# EAGLE board stream_i-o_2_3_Alap (EAGLE 7.4.0), part 1 of 2
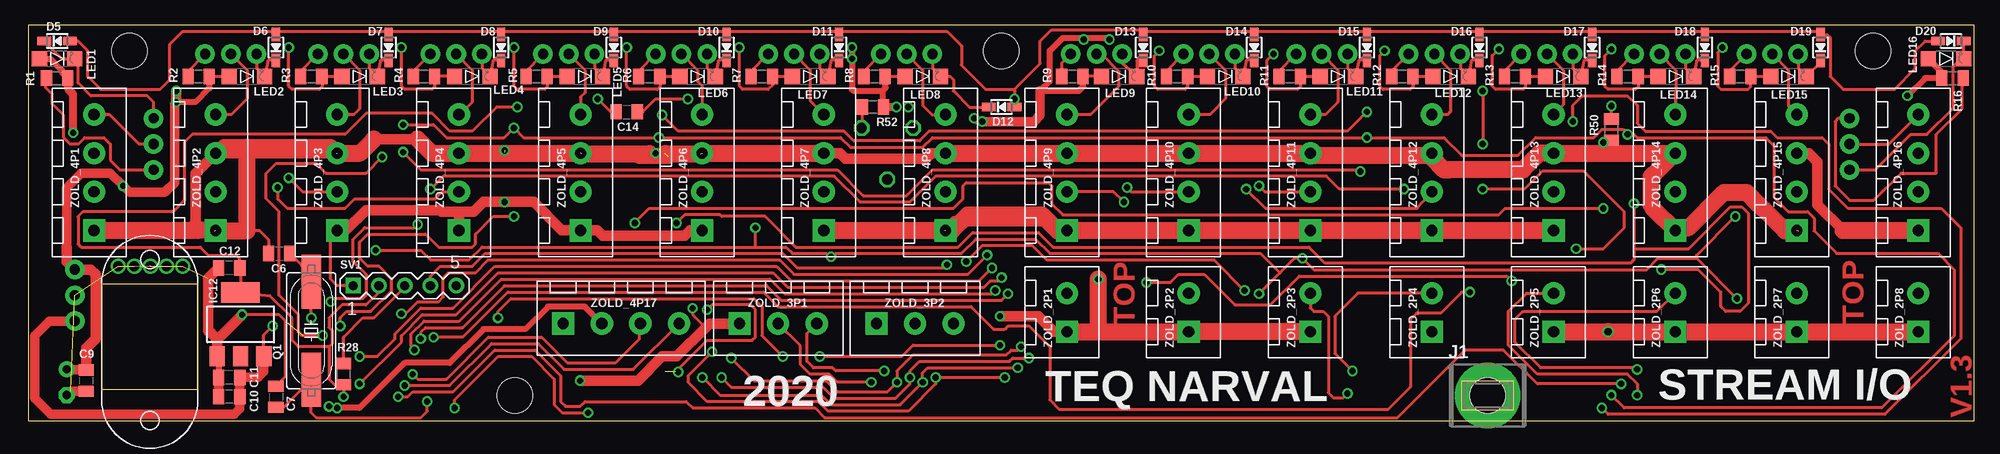
[diagram p0: board, top side]
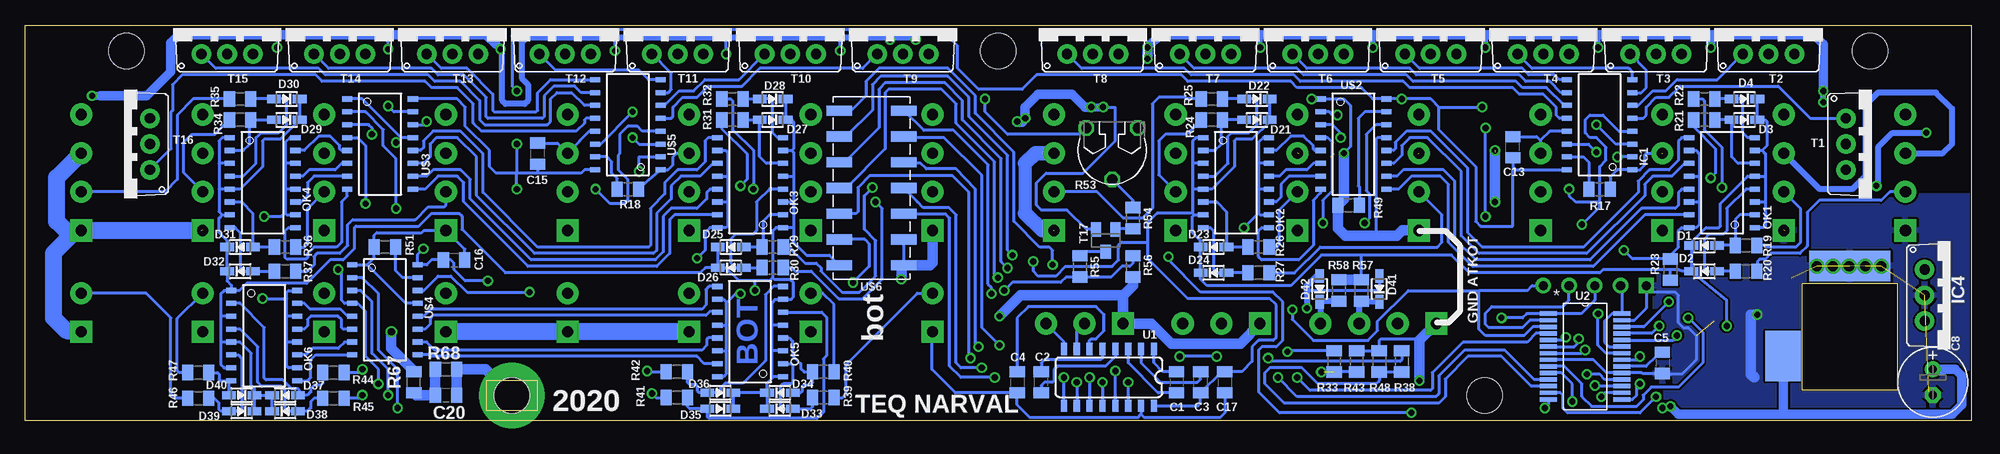
[diagram p1: board, bottom side, seen from below]

Size 192 x 39 mm. Coordinates in mm from the lower left corner, seen from the top.
Outline: 0,0 192,0 192,39 0,39 0,0
Copper layers (1*16): Top 0.035mm / dielectric 1.5mm / Bottom 0.035mm
Design rules "10mil *": minimum track width 10mil, minimum drill 24mil, track to track 7mil, track to pad 7mil, pad to pad 7mil, via to via 7mil, smd to smd 7mil, copper to edge 5mil, drill to drill 5mil, minimum pad ring 10mil, minimum via ring 8mil, stop-mask expansion 4mil, vias tented up to drill 0mil, thermal gap 10mil
Net classes: 0 default: width 0.203 mm, clearance 0.203 mm
Holes 3.5 mm at 10,36.5 96,36.5 182,36.5 48,2.5 144,2.5

## Footprints (pad centres in the part's own frame; a part is rotated, then mirrored left to right if it is on the bottom)
C0805 = smd 1.1 x 1.5: 1 -1.05,0; 2 1.05,0
E2,5-7 = drill 0.813 pad 1.6: + -1.27,0 | drill 0.813 pad 1.6 octagon: - 1.27,0
SOD-323 = smd 1.35 x 0.8: A 1.27,0; C -1.27,0
DC_55/21 = smd 8 x 3 bottom: 1 0,6.985 | smd 3.5 x 5 bottom: 2 6.565,-1.905
SOP16 = smd 1 x 0.5: 1 -3.24,4.445; 2 -3.24,3.175; 3 -3.24,1.905; 4 -3.24,0.635; 5 -3.24,-0.635; 6 -3.24,-1.905; 7 -3.24,-3.175; 8 -3.24,-4.445; 9 3.24,-4.445; 10 3.24,-3.175; 11 3.24,-1.905; 12 3.24,-0.635; 13 3.24,0.635; 14 3.24,1.905; 15 3.24,3.175; 16 3.24,4.445
TO220V = drill 1.016 pad 1.93: 1 -2.54,-2.54; 2 0,-2.54; 3 2.54,-2.54
SOT223 = smd 1.5 x 2: 1 -2.3,-3.15; 2 0,-3.15; 3 2.3,-3.15 | smd 3.8 x 2: 4 0,3.15
62221 = drill 3.5 pad 6.452: 1 0,0
CHIPLED_1206 = smd 1.5 x 1.5: A 0,-1.75; C 0,1.75
MINI-FLAT-16 = smd 1 x 0.5: 1 -3.24,4.445; 2 -3.24,3.175; 3 -3.24,1.905; 4 -3.24,0.635; 5 -3.24,-0.635; 6 -3.24,-1.905; 7 -3.24,-3.175; 8 -3.24,-4.445; 9 3.24,-4.445; 10 3.24,-3.175; 11 3.24,-1.905; 12 3.24,-0.635; 13 3.24,0.635; 14 3.24,1.905; 15 3.24,3.175; 16 3.24,4.445
HC49UP = smd 5.334 x 1.93: 1 -4.826,0; 2 4.826,0
R0805 = smd 1.1 x 1.5: 1 -1.05,0; 2 1.05,0
PT-6 = drill 1.016 octagon: A -2.54,-5.08; E 2.54,-5.08; S 0,0
MA05-1 = drill 0.914 pad 1.524 square: 1 -5.08,0 | drill 0.914 pad 1.524: 2 -2.54,0; 3 0,0; 4 2.54,0; 5 5.08,0
SOT23-BEC = smd 1 x 1.4: B -0.95,-1.1; C 0,1.1; E 0.95,-1.1
SO016 = smd 0.6 x 1.2: 1 -4.445,-2.8; 2 -3.175,-2.8; 3 -1.905,-2.8; 4 -0.635,-2.8; 5 0.635,-2.8; 6 1.905,-2.8; 7 3.175,-2.8; 8 4.445,-2.8; 9 4.445,2.8; 10 3.175,2.8; 11 1.905,2.8; 12 0.635,2.8; 13 -0.635,2.8; 14 -1.905,2.8; 15 -3.175,2.8; 16 -4.445,2.8
SSOP28_MC = smd 1.676 x 0.432: 1 -3.617,4.225; 2 -3.617,3.575; 3 -3.617,2.925; 4 -3.617,2.275; 5 -3.617,1.625; 6 -3.617,0.975; 7 -3.617,0.325; 8 -3.617,-0.325; 9 -3.617,-0.975; 10 -3.617,-1.625; 11 -3.617,-2.275; 12 -3.617,-2.925; 13 -3.617,-3.575; 14 -3.617,-4.225; 15 3.617,-4.225; 16 3.617,-3.575; 17 3.617,-2.925; 18 3.617,-2.275; 19 3.617,-1.625; 20 3.617,-0.975; 21 3.617,-0.325; 22 3.617,0.325; 23 3.617,0.975; 24 3.617,1.625; 25 3.617,2.275; 26 3.617,2.925; 27 3.617,3.575; 28 3.617,4.225
PIN_HEADER_2X7 = smd 1.016 x 2.54: 1A -7.62,3.175; 1B -7.62,-3.175; 2A -5.08,3.175; 2B -5.08,-3.175; 3A -2.54,3.175; 3B -2.54,-3.175; 4A 0,3.175; 4B 0,-3.175; 5A 2.54,3.175; 5B 2.54,-3.175; 6A 5.08,3.175; 6B 5.08,-3.175; 7A 7.62,3.175; 7B 7.62,-3.175
ZOLD_KICSI_2P = drill 1.1 pad 2.184 square: 1 -1.905,-0.5 | drill 1.1 pad 2.184: 2 1.905,-0.5
ZOLD_KICSI_3P = drill 1.1 pad 2.184 square: 1 -3.81,-0.5 | drill 1.1 pad 2.184: 2 0,-0.5; 3 3.81,-0.5
ZOLD_KICSI_4P = drill 1.1 pad 2.184 square: 1 -5.715,-0.5 | drill 1.1 pad 2.184: 2 -1.905,-0.5; 3 1.905,-0.5; 4 5.715,-0.5

## Placement (x,y rotation side)
C1  1u  [C0805]  78.42,3.81 270 bottom
C2  1u  [C0805]  91.76,3.81 90 bottom
C3  1u  [C0805]  76.04,3.81 90 bottom
C4  1u  [C0805]  94.14,3.81 270 bottom
C5  10u  [C0805]  30.48,5.71 270 bottom
C6  22p  [C0805]  24.76,16.51 0 top
C7  22p  [C0805]  24.45,2.38 270 top
C8  220u  [E2,5-7]  3.81,3.81 270 bottom
C9  100n  [C0805]  5.71,3.97 270 top
C10  10u  [C0805]  19.84,2.38 180 top
C11  10u  [C0805]  19.84,4.29 180 top
C12  10u  [C0805]  19.84,15.08 180 top
C13  100n  [C0805]  45.24,26.99 90 bottom
C14  100n  [C0805]  59.05,30.48 0 top
C15  100n  [C0805]  141.45,26.35 90 bottom
C16  100n  [C0805]  149.7,15.88 0 bottom
C17  100n  [C0805]  73.66,3.81 270 bottom
C20  100n  [C0805]  150.5,2.54 0 bottom
D1  1N4148  [SOD-323]  26.35,17.3 0 bottom
D2  1N4148  [SOD-323]  26.35,14.76 0 bottom
D3  1N4148  [SOD-323]  22.38,29.69 180 bottom
D4  1N4148  [SOD-323]  22.38,31.75 180 bottom
D5  1N4148  [SOD-323]  2.86,37.47 0 top
D6  1N4148  [SOD-323]  24.45,36.83 90 top
D7  1N4148  [SOD-323]  35.56,36.83 90 top
D8  1N4148  [SOD-323]  46.67,36.83 90 top
D9  1N4148  [SOD-323]  57.78,36.83 90 top
D10  1N4148  [SOD-323]  68.9,36.83 90 top
D11  1N4148  [SOD-323]  80.01,36.83 90 top
D12  1N4148  [SOD-323]  96.04,30.96 0 top
D13  1N4148  [SOD-323]  110.01,36.83 90 top
D14  1N4148  [SOD-323]  120.97,36.83 90 top
D15  1N4148  [SOD-323]  132.08,36.83 90 top
D16  1N4148  [SOD-323]  143.19,36.83 90 top
D17  1N4148  [SOD-323]  154.31,36.83 90 top
D18  1N4148  [SOD-323]  165.42,36.83 90 top
D19  1N4148  [SOD-323]  176.85,36.83 90 top
D20  1N4148  [SOD-323]  189.71,37.47 180 top
D21  1N4148  [SOD-323]  70.48,29.69 180 bottom
D22  1N4148  [SOD-323]  70.48,31.75 180 bottom
D23  1N4148  [SOD-323]  74.77,17.14 0 bottom
D24  1N4148  [SOD-323]  74.77,14.61 0 bottom
D25  1N4148  [SOD-323]  122.4,17.14 0 bottom
D26  1N4148  [SOD-323]  122.4,15.12 0 bottom
D27  1N4148  [SOD-323]  118.27,29.69 180 bottom
D28  1N4148  [SOD-323]  118.27,31.75 180 bottom
D29  1N4148  [SOD-323]  166.21,29.69 180 bottom
D30  1N4148  [SOD-323]  166.21,31.75 180 bottom
D31  1N4148  [SOD-323]  170.81,17.14 0 bottom
D32  1N4148  [SOD-323]  170.81,14.76 0 bottom
D33  1N4148  [SOD-323]  117.55,1.19 0 bottom
D34  1N4148  [SOD-323]  117.55,2.78 0 bottom
D35  1N4148  [SOD-323]  123.43,1.19 180 bottom
D36  1N4148  [SOD-323]  123.43,2.78 180 bottom
D37  1N4148  [SOD-323]  166.37,2.54 0 bottom
D38  1N4148  [SOD-323]  166.37,0.95 0 bottom
D39  1N4148  [SOD-323]  170.66,0.95 180 bottom
D40  1N4148  [SOD-323]  170.66,2.54 180 bottom
D41  1N4148  [SOD-323]  58.42,13.02 90 bottom
D42  1N4148  [SOD-323]  64.29,13.02 90 bottom
DC1  DC_55/21  [DC_55/21]  12,8.3 0 top
IC1  SCT21SOP16  [SOP16]  36.67,29.21 180 bottom
IC4  7805TV  [TO220V]  2.06,12.38 270 bottom
IC12  LD117AS33TR  [SOT223]  20.95,9.53 0 top
J1  PIN1-2  [62221]  144,2.5 0 top
LED1  RED  [CHIPLED_1206]  2.86,35.72 270 top
LED2  RED  [CHIPLED_1206]  21.59,33.97 270 top
LED3  RED  [CHIPLED_1206]  32.7,33.97 270 top
LED4  RED  [CHIPLED_1206]  43.81,33.97 270 top
LED5  RED  [CHIPLED_1206]  54.93,33.97 270 top
LED6  RED  [CHIPLED_1206]  66.04,33.97 270 top
LED7  RED  [CHIPLED_1206]  77.15,33.97 270 top
LED8  RED  [CHIPLED_1206]  88.26,33.97 270 top
LED9  RED  [CHIPLED_1206]  107.63,33.97 270 top
LED10  RED  [CHIPLED_1206]  118.11,33.97 270 top
LED11  RED  [CHIPLED_1206]  129.22,33.97 270 top
LED12  RED  [CHIPLED_1206]  140.33,33.97 270 top
LED13  RED  [CHIPLED_1206]  151.45,33.97 270 top
LED14  RED  [CHIPLED_1206]  162.56,33.97 270 top
LED15  RED  [CHIPLED_1206]  173.67,33.97 270 top
LED16  RED  [CHIPLED_1206]  189.23,35.72 270 top
OK1  TLP281-4  [MINI-FLAT-16]  24.61,23.5 180 bottom
OK2  TLP281-4  [MINI-FLAT-16]  72.55,23.5 0 bottom
OK3  TLP281-4  [MINI-FLAT-16]  120.49,23.5 180 bottom
OK4  TLP281-4  [MINI-FLAT-16]  168.59,23.5 0 bottom
OK5  TLP281-4  [MINI-FLAT-16]  120.49,8.81 180 bottom
OK6  TLP281-4  [MINI-FLAT-16]  168.43,8.41 0 bottom
Q1  20MHz  [HC49UP]  27.94,8.89 90 top
R1  6R8  [R0805]  2.86,33.81 0 top
R2  6R8  [R0805]  16.83,33.97 0 top
R3  6R8  [R0805]  27.94,33.97 0 top
R4  6R8  [R0805]  39.05,33.97 0 top
R5  6R8  [R0805]  50.16,33.97 0 top
R6  6R8  [R0805]  61.28,33.97 0 top
R7  6R8  [R0805]  72.39,33.97 0 top
R8  6R8  [R0805]  83.5,33.97 0 top
R9  6R8  [R0805]  103.03,33.97 0 top
R10  6R8  [R0805]  113.35,33.97 0 top
R11  6R8  [R0805]  124.46,33.97 0 top
R12  6R8  [R0805]  135.57,33.97 0 top
R13  6R8  [R0805]  146.69,33.97 0 top
R14  6R8  [R0805]  157.8,33.97 0 top
R15  6R8  [R0805]  168.91,33.97 0 top
R16  6R8  [R0805]  189.87,33.81 180 top
R17  10k  [R0805]  36.67,22.86 180 bottom
R18  10k  [R0805]  132.56,22.86 180 bottom
R19  2k2  [R0805]  22.22,17.3 180 bottom
R20  2k2  [R0805]  22.22,14.76 180 bottom
R21  2k2  [R0805]  26.35,29.69 0 bottom
R22  2k2  [R0805]  26.35,31.75 0 bottom
R23  1k  [R0805]  29.69,14.92 270 bottom
R24  2k2  [R0805]  74.93,29.69 0 bottom
R25  2k2  [R0805]  74.93,31.75 0 bottom
R26  2k2  [R0805]  70.33,17.14 180 bottom
R27  2k2  [R0805]  70.33,14.61 180 bottom
R28  1k  [R0805]  31.11,4.6 270 top
R29  2k2  [R0805]  118.27,17.14 180 bottom
R30  2k2  [R0805]  118.27,15.12 180 bottom
R31  2k2  [R0805]  122.24,29.69 0 bottom
R32  2k2  [R0805]  122.24,31.75 0 bottom
R33  1k  [R0805]  62.86,5.87 90 bottom
R34  2k2  [R0805]  170.81,29.69 0 bottom
R35  2k2  [R0805]  170.81,31.75 0 bottom
R36  2k2  [R0805]  166.37,17.14 180 bottom
R37  2k2  [R0805]  166.37,14.76 180 bottom
R38  1k  [R0805]  56.2,5.87 90 bottom
R39  2k2  [R0805]  113.27,2.3 180 bottom
R40  2k2  [R0805]  113.27,4.84 180 bottom
R41  2k2  [R0805]  127.71,2.3 0 bottom
R42  2k2  [R0805]  127.71,4.84 0 bottom
R43  2k2  [R0805]  60.64,5.87 270 bottom
R44  2k2  [R0805]  161.61,4.76 180 bottom
R45  2k2  [R0805]  161.61,2.22 180 bottom
R46  2k2  [R0805]  174.94,2.22 0 bottom
R47  2k2  [R0805]  174.94,4.76 0 bottom
R48  2k2  [R0805]  58.42,5.87 270 bottom
R49  2k2  [R0805]  61.44,21.27 0 bottom
R50  2k2  [R0805]  156.21,28.73 90 top
R51  2k2  [R0805]  156.53,17.14 0 bottom
R52  4k7  [R0805]  83.34,30.96 0 top
R53  10k  [PT-6]  84.77,23.81 180 bottom
R54  10k  [R0805]  82.71,20 90 bottom
R55  10k  [R0805]  87.95,15.24 90 bottom
R56  3k3  [R0805]  82.71,15.24 90 bottom
R57  4k7  [R0805]  60.17,12.86 90 bottom
R58  4k7  [R0805]  62.39,12.86 90 bottom
R67  100  [R0805]  153.67,3.81 90 bottom
R68  10k  [R0805]  150.5,5.08 180 bottom
SV1  PROG  [MA05-1]  37.15,13.34 0 top
T1  BD242  [TO220V]  9.84,27.3 270 bottom
T2  BD242  [TO220V]  20,38.73 0 bottom
T3  BD242  [TO220V]  31.11,38.73 0 bottom
T4  BD242  [TO220V]  42.23,38.73 0 bottom
T5  BD242  [TO220V]  53.34,38.73 0 bottom
T6  BD242  [TO220V]  64.45,38.73 0 bottom
T7  BD242  [TO220V]  75.56,38.73 0 bottom
T8  BD242  [TO220V]  86.68,38.73 0 bottom
T9  BD242  [TO220V]  105.41,38.73 0 bottom
T10  BD242  [TO220V]  116.52,38.73 0 bottom
T11  BD242  [TO220V]  127.63,38.73 0 bottom
T12  BD242  [TO220V]  138.75,38.73 0 bottom
T13  BD242  [TO220V]  149.86,38.73 0 bottom
T14  BD242  [TO220V]  160.97,38.73 0 bottom
T15  BD242  [TO220V]  172.08,38.73 0 bottom
T16  BD242  [TO220V]  182.25,27.3 90 bottom
T17  BC858  [SOT23-BEC]  85.41,17.78 180 bottom
U1  MAX232SOIC16  [SO016]  85.09,4.29 180 bottom
U2  PIC32MX250F128B-I_SS  [SSOP28_MC]  38.1,6.35 0 bottom
U$2  SCT21SOP16  [SOP16]  60.96,27.3 0 bottom
U$3  SCT21SOP16  [SOP16]  157,27.3 0 bottom
U$4  SCT21SOP16  [SOP16]  156.53,10.95 0 bottom
U$5  SCT21SOP16  [SOP16]  132.56,29.21 180 bottom
U$6  PIN_HEADER_2X7  [PIN_HEADER_2X7]  108.51,22.97 270 bottom
ZOLD_2P1  ZOLD_KICSI_2P  [ZOLD_KICSI_2P]  102,10.7 90 top
ZOLD_2P2  ZOLD_KICSI_2P  [ZOLD_KICSI_2P]  114,10.7 90 top
ZOLD_2P3  ZOLD_KICSI_2P  [ZOLD_KICSI_2P]  126,10.7 90 top
ZOLD_2P4  ZOLD_KICSI_2P  [ZOLD_KICSI_2P]  138,10.7 90 top
ZOLD_2P5  ZOLD_KICSI_2P  [ZOLD_KICSI_2P]  150,10.7 90 top
ZOLD_2P6  ZOLD_KICSI_2P  [ZOLD_KICSI_2P]  162,10.7 90 top
ZOLD_2P7  ZOLD_KICSI_2P  [ZOLD_KICSI_2P]  174,10.7 90 top
ZOLD_2P8  ZOLD_KICSI_2P  [ZOLD_KICSI_2P]  186,10.7 90 top
ZOLD_3P1  ZOLD_KICSI_3P  [ZOLD_KICSI_3P]  74,10.1 0 top
ZOLD_3P2  ZOLD_KICSI_3P  [ZOLD_KICSI_3P]  87.5,10.1 0 top
ZOLD_4P1  ZOLD_KICSI_4P  [ZOLD_KICSI_4P]  6,24.5 90 top
ZOLD_4P2  ZOLD_KICSI_4P  [ZOLD_KICSI_4P]  18,24.5 90 top
ZOLD_4P3  ZOLD_KICSI_4P  [ZOLD_KICSI_4P]  30,24.5 90 top
ZOLD_4P4  ZOLD_KICSI_4P  [ZOLD_KICSI_4P]  42,24.5 90 top
ZOLD_4P5  ZOLD_KICSI_4P  [ZOLD_KICSI_4P]  54,24.5 90 top
ZOLD_4P6  ZOLD_KICSI_4P  [ZOLD_KICSI_4P]  66,24.5 90 top
ZOLD_4P7  ZOLD_KICSI_4P  [ZOLD_KICSI_4P]  78,24.5 90 top
ZOLD_4P8  ZOLD_KICSI_4P  [ZOLD_KICSI_4P]  90,24.5 90 top
ZOLD_4P9  ZOLD_KICSI_4P  [ZOLD_KICSI_4P]  102,24.5 90 top
ZOLD_4P10  ZOLD_KICSI_4P  [ZOLD_KICSI_4P]  114,24.5 90 top
ZOLD_4P11  ZOLD_KICSI_4P  [ZOLD_KICSI_4P]  126,24.5 90 top
ZOLD_4P12  ZOLD_KICSI_4P  [ZOLD_KICSI_4P]  138,24.5 90 top
ZOLD_4P13  ZOLD_KICSI_4P  [ZOLD_KICSI_4P]  150,24.5 90 top
ZOLD_4P14  ZOLD_KICSI_4P  [ZOLD_KICSI_4P]  162,24.5 90 top
ZOLD_4P15  ZOLD_KICSI_4P  [ZOLD_KICSI_4P]  174,24.5 90 top
ZOLD_4P16  ZOLD_KICSI_4P  [ZOLD_KICSI_4P]  186,24.5 90 top
ZOLD_4P17  ZOLD_KICSI_4P  [ZOLD_KICSI_4P]  58.5,10.1 0 top

## Library data of the parts
C1-C17 C20 R1-R52 R54-R58 R67 R68 = rcl
D1-D42 = microbuilder
DC1 U$6 ZOLD_2P1-ZOLD_2P8 ZOLD_3P1 ZOLD_3P2 ZOLD_4P1-ZOLD_4P17 = narval
IC1 U$2-U$5 = StarChips
IC4 = linear
IC12 = v-reg
J1 = con-faston; MF: TYCO ELECTRONICS; MPN: 62221-1; OC_FARNELL: unknown; OC_NEWARK: 16H2318
LED1-LED16 = led
OK1-OK6 = optocoupler; OC_FARNELL: unknown; OC_NEWARK: unknown
Q1 = crystal; OC_FARNELL: unknown; OC_NEWARK: unknown
R53 = pot
SV1 = con-lstb; OC_FARNELL: unknown; OC_NEWARK: unknown
T1-T17 = transistor
U1 = SparkFun-DigitalIC
U2 = microchip_pic32

## Nets
+3V3: C12.1 C13.1 C14.1 C15.1 C16.1 IC1.16 IC12.4 R28.2 SV1.2 U2.13 U2.23 U2.28 U$2.16 U$3.16 U$4.16 U$5.16 U$6.6B
+5V: C3.1 C10.1 C11.1 C17.1 D1.C D2.C D3.C D4.C D21.C D22.C D23.C D24.C D25.C D26.C D27.C D28.C D29.C D30.C D31.C D32.C D33.C D34.C D35.C D36.C D37.C D38.C D39.C D40.C IC4.3 IC12.3 OK1.1 OK1.3 OK1.5 OK1.7 OK2.1 OK2.3 OK2.5 OK2.7 OK3.1 OK3.3 OK3.5 OK3.7 OK4.1 OK4.3 OK4.5 OK4.7 OK5.1 OK5.3 OK5.5 OK5.7 OK6.1 OK6.3 OK6.5 OK6.7 R23.2 R57.2 R58.2 U1.16 U$6.7B
+12V: C8.+ C9.1 DC1.2 IC4.1 LED1.A LED2.A LED3.A LED4.A LED5.A LED6.A LED7.A LED8.A LED9.A LED10.A LED11.A LED12.A LED13.A LED14.A LED15.A LED16.A R1.2 R2.2 R3.2 R4.2 R5.2 R6.2 R7.2 R8.2 R9.2 R10.2 R11.2 R12.2 R13.2 R14.2 R15.2 R16.2 R52.2 T17.E ZOLD_4P17.2
CHECK: U2.5 U$4.14
CLK: IC1.3 U2.25 U$2.3 U$3.3 U$4.3 U$5.3
D+: U2.21 U$6.3B
D-: U2.22 U$6.2B
GND: C4.2 C5.2 C6.1 C7.1 C8.- C9.2 C10.2 C11.2 C12.2 C13.2 C14.2 C15.2 C16.2 C17.2 D41.A D42.A DC1.1 IC1.1 IC1.13 IC4.2 IC12.1 R17.1 R18.1 R43.1 R48.1 R49.1 R50.1 R51.1 R56.1 R67.2 SV1.1 U1.15 U2.8 U2.19 U2.27 U$2.1 U$2.13 U$3.1 U$3.13 U$4.1 U$4.13 U$5.1 U$5.13 U$6.6A U$6.7A ZOLD_2P1.1 ZOLD_2P2.1 ZOLD_2P3.1 ZOLD_2P4.1 ZOLD_2P5.1 ZOLD_2P6.1 ZOLD_2P7.1 ZOLD_2P8.1 ZOLD_3P1.1 ZOLD_3P2.1 ZOLD_4P1.1 ZOLD_4P1.3 ZOLD_4P2.1 ZOLD_4P2.3 ZOLD_4P3.1 ZOLD_4P3.3 ZOLD_4P4.1 ZOLD_4P4.3 ZOLD_4P5.1 ZOLD_4P5.3 ZOLD_4P6.1 ZOLD_4P6.3 ZOLD_4P7.1 ZOLD_4P7.3 ZOLD_4P8.1 ZOLD_4P8.3 ZOLD_4P9.1 ZOLD_4P9.3 ZOLD_4P10.1 ZOLD_4P10.3 ZOLD_4P11.1 ZOLD_4P11.3 ZOLD_4P12.1 ZOLD_4P12.3 ZOLD_4P13.1 ZOLD_4P13.3 ZOLD_4P14.1 ZOLD_4P14.3 ZOLD_4P15.1 ZOLD_4P15.3 ZOLD_4P16.1 ZOLD_4P16.3 ZOLD_4P17.1
LABE: U2.16 U$2.4 U$3.4 U$4.4
LAKI: IC1.4 U2.26 U$5.4
MCLR: R28.1 SV1.3 U2.1 U$6.2A
N$1: D8.C IC1.8 LED4.C T4.1
N$2: D5.C IC1.5 LED1.C T1.1
N$3: R1.1 T1.3
N$4: T1.2 ZOLD_4P1.4
N$5: D6.C IC1.6 LED2.C T2.1
N$6: R2.1 T2.3
N$7: T2.2 ZOLD_4P2.4
N$8: D7.C IC1.7 LED3.C T3.1
N$9: R3.1 T3.3
N$10: T3.2 ZOLD_4P3.4
N$11: R4.1 T4.3
N$12: T4.2 ZOLD_4P4.4
N$13: D9.C IC1.9 LED5.C T5.1
N$14: R5.1 T5.3
N$15: T5.2 ZOLD_4P5.4
N$16: D10.C IC1.10 LED6.C T6.1
N$17: R6.1 T6.3
N$18: T6.2 ZOLD_4P6.4
N$19: D11.C IC1.11 LED7.C T7.1
N$20: R7.1 T7.3
N$21: T7.2 ZOLD_4P7.4
N$22: D12.C IC1.12 LED8.C T8.1
N$23: R8.1 T8.3
N$24: T8.2 ZOLD_4P8.4
N$25: IC1.15 R17.2
N$26: R18.2 U$5.15
N$27: IC1.14 U$5.2
N$28: R20.1 ZOLD_4P1.2
N$29: D1.A OK1.2 R19.2
N$30: R19.1 ZOLD_4P2.2
N$31: D2.A OK1.4 R20.2
N$32: R21.1 ZOLD_4P3.2
N$33: D13.C LED9.C T9.1 U$5.5
N$34: R9.1 T9.3
N$35: T9.2 ZOLD_4P9.4
N$36: D14.C LED10.C T10.1 U$5.6
N$37: R10.1 T10.3
N$38: T10.2 ZOLD_4P10.4
N$39: D15.C LED11.C T11.1 U$5.7
N$40: R11.1 T11.3
N$41: T11.2 ZOLD_4P11.4
N$42: D16.C LED12.C T12.1 U$5.8
N$43: R12.1 T12.3
N$44: T12.2 ZOLD_4P12.4
N$45: D17.C LED13.C T13.1 U$5.9
N$46: R13.1 T13.3
N$47: T13.2 ZOLD_4P13.4
N$48: D18.C LED14.C T14.1 U$5.10
N$49: R14.1 T14.3
N$50: T14.2 ZOLD_4P14.4
N$51: D19.C LED15.C T15.1 U$5.11
N$52: R15.1 T15.3
N$53: T15.2 ZOLD_4P15.4
N$54: D20.C LED16.C T16.1 U$5.12
N$55: R16.1 T16.3
N$56: T16.2 ZOLD_4P16.4
N$57: D3.A OK1.6 R21.2
N$58: R22.1 ZOLD_4P4.2
N$59: D4.A OK1.8 R22.2
N$60: R35.1 ZOLD_4P16.2
N$61: D5.A D6.A D7.A D8.A D9.A D10.A D11.A D12.A D13.A D14.A D15.A D16.A D17.A D18.A D19.A D20.A R53.E
N$62: D25.A OK3.2 R29.2
N$63: D26.A OK3.4 R30.2
N$64: OK1.15 U$2.9
N$65: OK1.13 U$2.10
N$66: OK1.11 U$2.11
N$67: OK1.9 U$2.12
N$68: D21.A OK2.2 R24.2
N$69: D22.A OK2.4 R25.2
N$70: D23.A OK2.6 R26.2
N$71: D24.A OK2.8 R27.2
N$72: R25.1 ZOLD_4P8.2
N$73: R24.1 ZOLD_4P7.2
N$74: R26.1 ZOLD_4P6.2
N$75: R27.1 ZOLD_4P5.2
N$76: OK5.15 U$4.9
N$77: OK2.15 U$2.5
N$78: OK2.13 U$2.6
N$79: OK2.11 U$2.7
N$80: OK2.9 U$2.8
N$81: D27.A OK3.6 R31.2
N$82: D28.A OK3.8 R32.2
N$83: R30.1 ZOLD_4P9.2
N$84: R29.1 ZOLD_4P10.2
N$85: R31.1 ZOLD_4P11.2
N$86: R32.1 ZOLD_4P12.2
N$87: R34.1 ZOLD_4P15.2
N$88: OK3.15 U$3.9
N$89: OK3.13 U$3.10
N$90: OK3.11 U$3.11
N$91: OK3.9 U$3.12
N$92: D29.A OK4.2 R34.2
N$93: D30.A OK4.4 R35.2
N$94: D31.A OK4.6 R36.2
N$95: D32.A OK4.8 R37.2
N$96: OK5.13 U$4.10
N$98: R36.1 ZOLD_4P14.2
N$99: R37.1 ZOLD_4P13.2
N$100: OK5.11 U$4.11
N$101: OK4.15 U$3.5
N$102: OK4.13 U$3.6
N$103: OK4.11 U$3.7
N$104: OK4.9 U$3.8
N$105: D33.A OK5.2 R39.2
N$106: D34.A OK5.4 R40.2
N$107: D35.A OK5.6 R41.2
N$108: D36.A OK5.8 R42.2
N$109: R39.1 ZOLD_2P1.2
N$110: R40.1 ZOLD_2P2.2
N$111: R41.1 ZOLD_2P3.2
N$112: R42.1 ZOLD_2P4.2
N$113: OK5.9 U$4.12
N$114: R45.1 ZOLD_2P5.2
N$115: R47.1 ZOLD_2P7.2
N$116: R44.1 ZOLD_2P6.2
N$117: R46.1 ZOLD_2P8.2
N$118: D37.A OK6.2 R44.2
N$119: D38.A OK6.4 R45.2
N$120: D39.A OK6.6 R46.2
N$121: D40.A OK6.8 R47.2
N$122: C1.2 U1.3
N$123: C1.1 U1.1
N$124: C2.1 U1.4
N$125: C2.2 U1.5
N$126: C3.2 U1.2
N$127: OK6.15 U$4.5
N$128: OK6.13 U$4.6
N$129: OK6.11 U$4.7
N$130: OK6.9 U$4.8
N$131: R51.2 U$4.15
N$132: R50.2 U$3.15
N$133: R49.2 U$2.15
N$134: U$2.2 U$5.14
N$135: U$2.14 U$3.2
N$136: U$3.14 U$4.2
N$137: U1.14 ZOLD_3P1.2
N$138: C4.1 U1.6
N$139: U1.13 ZOLD_3P1.3
N$140: U1.7 ZOLD_3P2.2
N$141: U1.8 ZOLD_3P2.3
N$142: C5.1 U2.20
N$143: C20.1 R67.1 R68.2
N$144: R52.1 R53.A
N$145: R53.S R54.2
N$146: R54.1 T17.B
N$147: C20.2 J1.1 R68.1
N$148: R55.2 T17.C
N$151: C7.2 Q1.1 U2.10
N$152: C6.2 Q1.2 U2.9
OVER_CURRENT_IN: R55.1 R56.2 U2.7
PGED: SV1.4 U2.2 U$6.1B
POWER: U2.6 U$6.1A
SCL1: D42.C R58.1 U2.17 ZOLD_4P17.4
SDA1: D41.C R57.1 U2.18 ZOLD_4P17.3
SDI1: OK1.10 OK1.12 OK1.14 OK1.16 OK2.10 OK2.12 OK2.14 OK2.16 OK3.10 OK3.12 OK3.14 OK3.16 OK4.10 OK4.12 OK4.14 OK4.16 OK5.10 OK5.12 OK5.14 OK5.16 OK6.10 OK6.12 OK6.14 OK6.16 R23.1 U2.14
SDO1: IC1.2 U2.24
U1RX: R38.1 R48.2 U2.12
U1RX_5V: R38.2 U1.12 U$6.3A
U1TX: U1.11 U2.11 U$6.5B
U2RX: R33.1 R43.2 SV1.5 U2.3
U2RX_5V: R33.2 U1.9 U$6.5A
U2TX: U1.10 U2.4 U$6.4A
VBUS: U2.15 U$6.4B